# Altium PCB NBP16 Xilinx Spartan-II PQ208 Rev1.01.PcbDoc (part 1 of 2)
Units mm, origin at the board's own origin, x right, y up, seen from the top; angles counter-clockwise.
Board outline 69 x 80.99 mm, 2 copper layers (Top Layer, Bottom Layer); 48 components, 186 nets, 518 pads, 188 vias.
Unrouted connection lines stored in the file: 1.
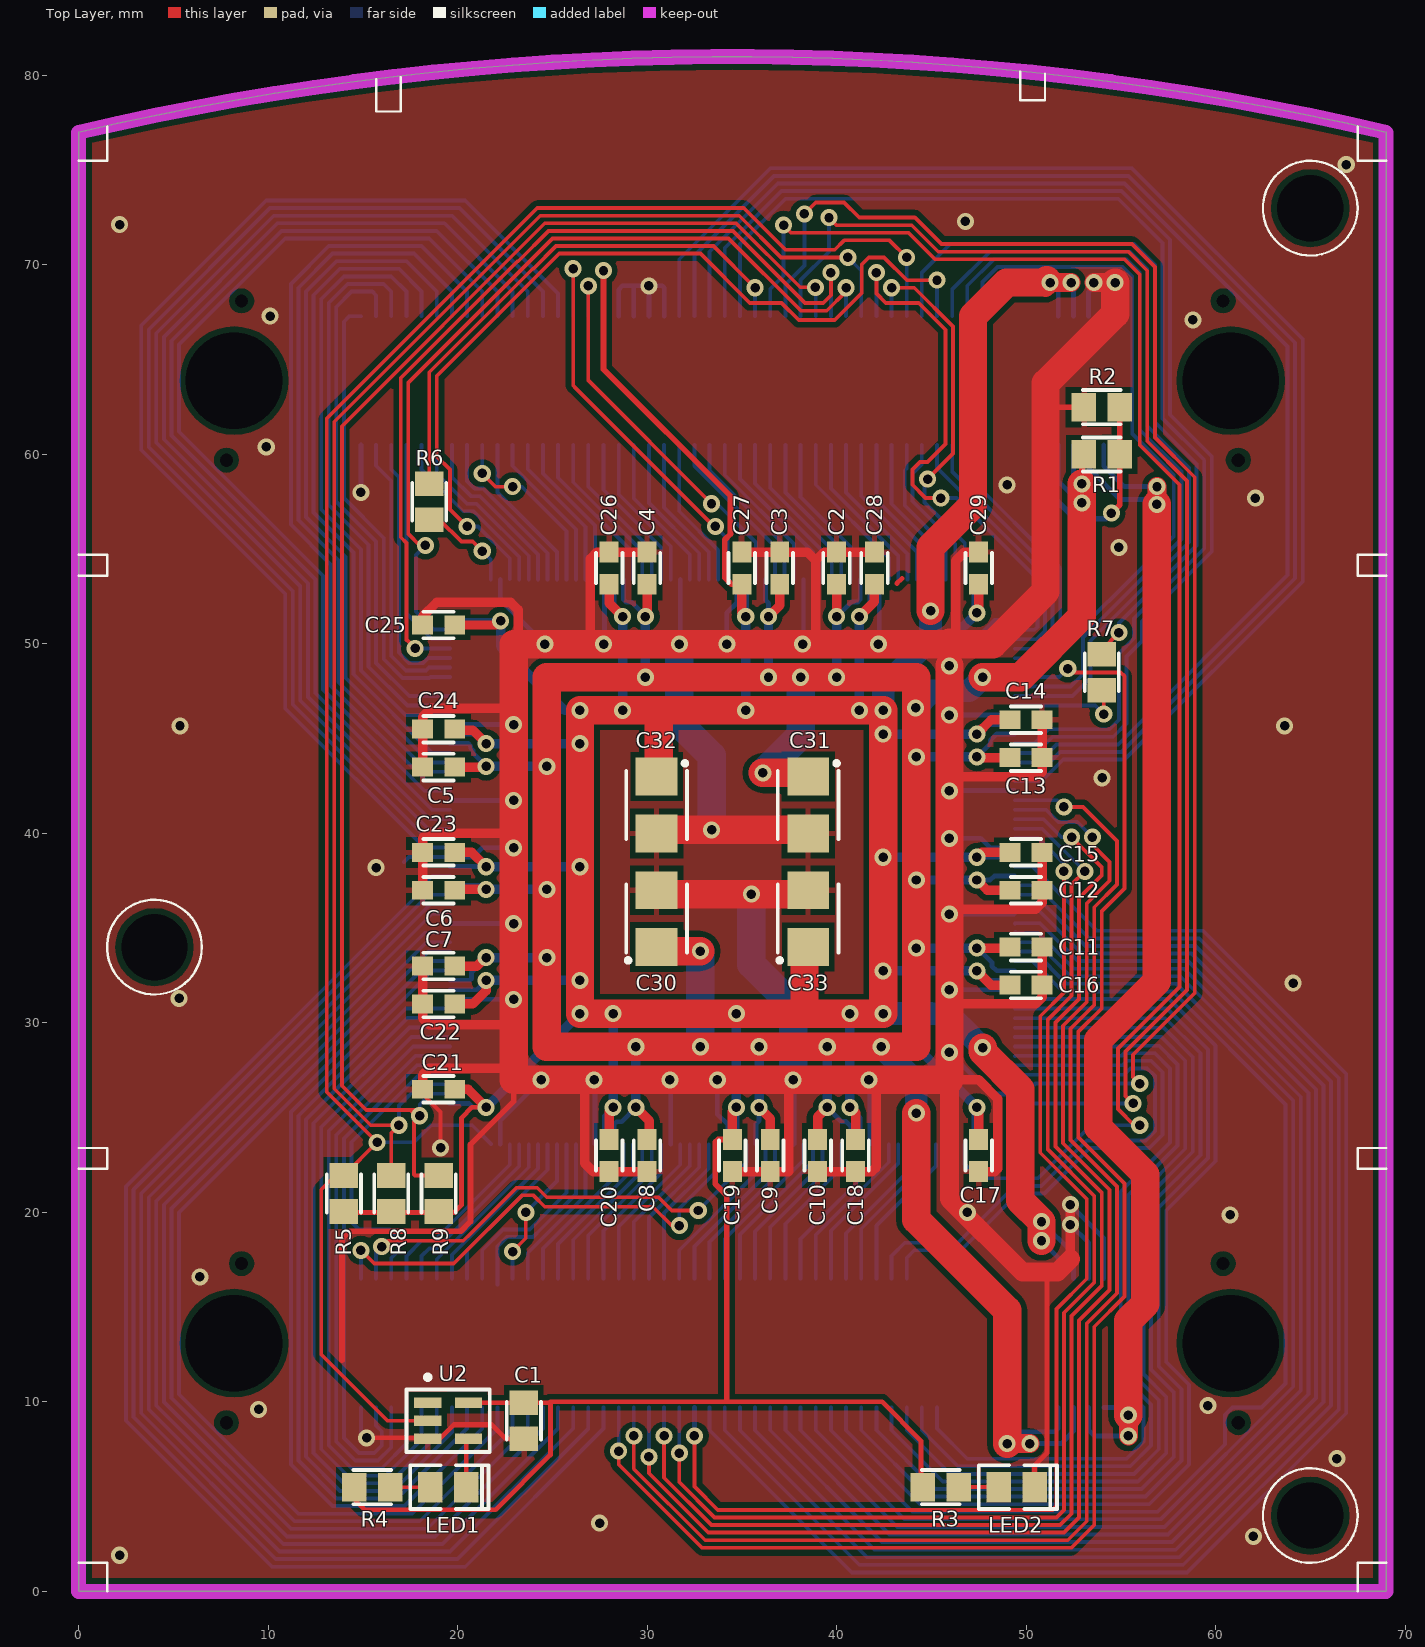
[diagram p0: Top Layer view]
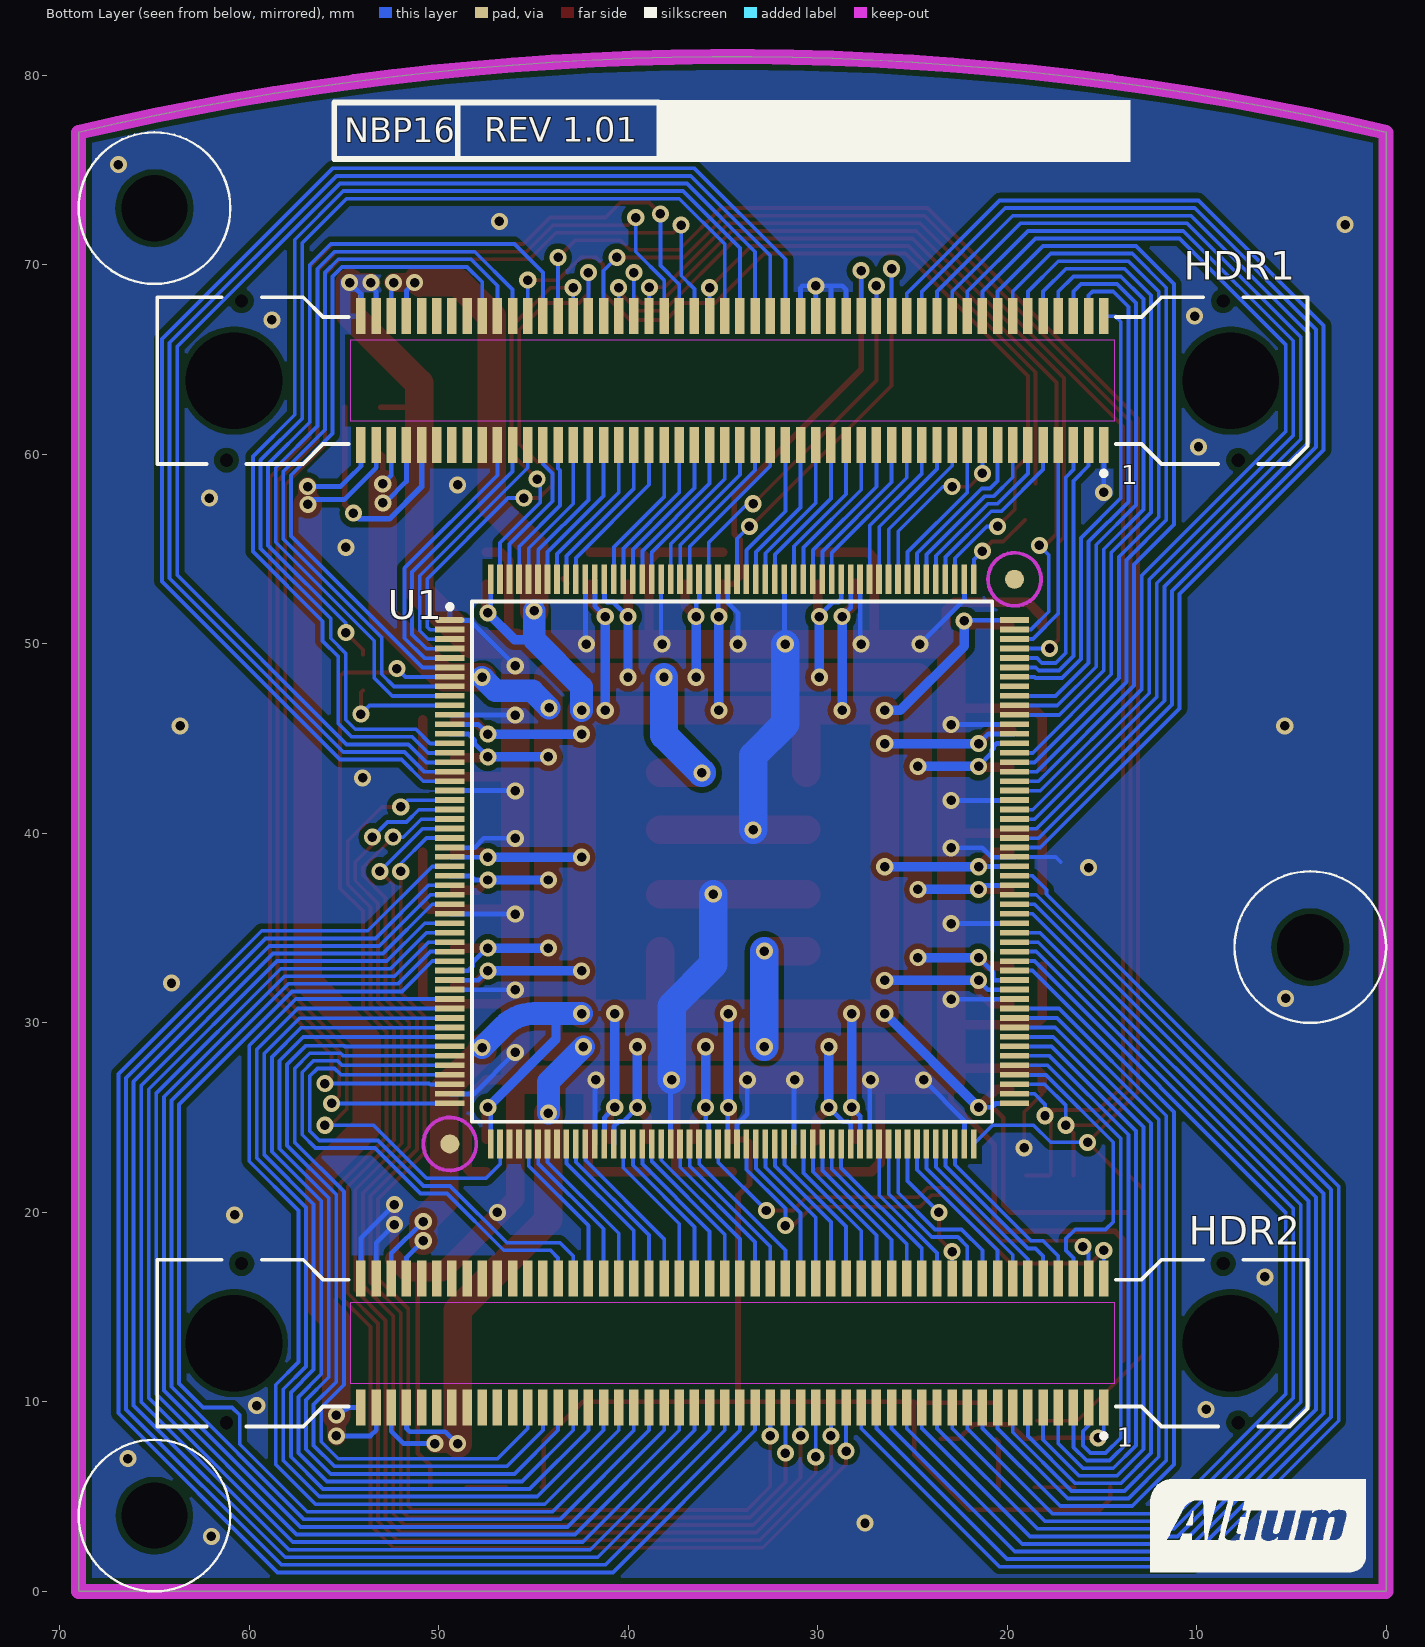
[diagram p1: Bottom Layer view, seen from below]

## Layer stack, top to bottom
Top Layer: signal copper 0.0356
Dielectric: core 0.32, FR-4, Dk 4.8
Bottom Layer: signal copper 0.0356

## Board outline
0,0 0.001,77 cw(c34.5,-69.801) 69,77 69,0

## Design rules (kind name [scope] priority, off if disabled: settings)
Clearance Clearance_Polygons [InPolygon] p1: gap=0.3
Clearance [All] p2: gap=0.2
ComponentClearance [All] p1: gap=0.2 collisioncheckmode=3 verticalgap=0.254 showdistances=FALSE
FabricationTestPointUsage TestPointUsage [All] p1 off: valid=0 allowmultiple=FALSE
FabricationTestpoint Testpoint [All] p1 off: side=3 testpointundercomponent=TRUE minsize=1.016 maxsize=2.54 preferedsize=1.524 minholesize=0 maxholesize=1.016 preferedholesize=0.813 testpointgrid=0.025 allowsidetop=TRUE allowsidebottom=TRUE usegrid=TRUE gridtolerance=0
HoleSize [All] p1: absolutevalues=TRUE maxlimit=5.2 minlimit=0.25 maxpercent=80.000 minpercent=20.000
PlaneClearance [All] p1: clearance=0.5
PlaneConnect PlaneConnect_Vias [IsVia] p1: planeconnectstyle=Direct reliefexpansion=0.508 reliefentries=4 reliefconductorwidth=0.254 reliefairgap=0.254
PlaneConnect [All] p2: planeconnectstyle=Relief reliefexpansion=0.5 reliefentries=4 reliefconductorwidth=0.25 reliefairgap=0.25
PolygonConnect [All] p1: connectstyle=Relief reliefconductorwidth=0.3 reliefentries=4 polygonreliefangle="90 Angle"
RoomDefinition BOCD_SpartanII_PQ208 [InComponentClass('BOCD_SpartanII_PQ208')] p1 off: confinementstyle=ConfineIn formatcopy=TRUE lockcomponents=FALSE outline 3.7,3.8 65.3,3.8 65.3,68.8 3.7,68.8
RoutingVias [All] p1: holewidth=0.5 width=0.9 viastyle="Through Hole" minholewidth=0.3 minwidth=0.6 maxholewidth=0.5 maxwidth=0.9
SMDNeckDown [All] p1: percent=100.000
SilkscreenOverComponentPads [All] p1: minsilkscreentomaskgap=0.254
SolderMaskExpansion SolderMaskExpansion_Vias [IsVia] p1: expansion=-0.2
SolderMaskExpansion [All] p2: expansion=0.1
Width [All] p1: maxlimit=1.5 minlimit=0.2 preferedwidth=0.25
21 further rules are at their usual default settings.

## Components (designator, comment, footprint, x,y, rotation, side; value= is the part's Value field where it differs from the comment)
C1 "0.1uF" CC2012-0805 23.5,9 r90 top
C2 "0.1uF" CC1608-0603 40,54 r90 top
C3 "0.1uF" CC1608-0603 37,54 r90 top
C4 "0.1uF" CC1608-0603 30,54 r90 top
C5 "0.1uF" CC1608-0603 19,43.5 r180 top
C6 "0.1uF" CC1608-0603 19,37 r180 top
C7 "0.1uF" CC1608-0603 19,33 r180 top
C8 "0.1uF" CC1608-0603 30,23 r270 top
C9 "0.1uF" CC1608-0603 36.5,23 r270 top
C10 "0.1uF" CC1608-0603 39,23 r270 top
C11 "0.1uF" CC1608-0603 50,34 r0 top
C12 "0.1uF" CC1608-0603 50,37 r0 top
C13 "0.1uF" CC1608-0603 50,44 r0 top
C14 "0.1uF" CC1608-0603 50,46 r0 top
C15 "0.1uF" CC1608-0603 50,39 r0 top
C16 "0.1uF" CC1608-0603 50,32 r0 top
C17 "0.1uF" CC1608-0603 47.5,23 r90 top
C18 "0.1uF" CC1608-0603 41,23 r90 top
C19 "0.1uF" CC1608-0603 34.5,23 r90 top
C20 "0.1uF" CC1608-0603 28,23 r90 top
C21 "0.1uF" CC1608-0603 19,26.5 r0 top
C22 "0.1uF" CC1608-0603 19,31 r180 top
C23 "0.1uF" CC1608-0603 19,39 r180 top
C24 "0.1uF" CC1608-0603 19,45.5 r180 top
C25 "0.1uF" CC1608-0603 19,51 r0 top
C26 "0.1uF" CC1608-0603 28,54 r270 top
C27 "0.1uF" CC1608-0603 35,54 r270 top
C28 "0.1uF" CC1608-0603 42,54 r270 top
C29 "0.1uF" CC1608-0603 47.5,54 r270 top
C30 "10uF TANT" MCCT-B 30.5,35.5 r90 top
C31 "10uF TANT" MCCT-B 38.5,41.5 r270 top
C32 "10uF TANT" MCCT-B 30.5,41.5 r270 top
C33 "10uF TANT" MCCT-B 38.5,35.5 r90 top
HDR1 "54075-1009" 54075 34.5,63.9 r0 bottom locked
HDR2 "54075-1009" 54075 34.5,13.1 r0 bottom locked
LED1 "HSMG-C170" "SMD _LED" 19.5,5.5 r180 top locked
LED2 "HSMH-C170" "SMD _LED" 49.5,5.5 r180 top locked
R1 "82R 1%" CC2012-0805 54,60 r0 top
R2 "680R 1%" CC2012-0805 54,62.5 r180 top
R3 "270R" CC2012-0805 45.5,5.5 r0 top
R4 "270R" CC2012-0805 15.5,5.5 r180 top
R5 "4K7" CC2012-0805 14,21 r90 top
R6 "100R" CC2012-0805 18.5,57.5 r270 top
R7 "100R" CC2012-0805 54,48.5 r90 top
R8 "4K7" CC2012-0805 16.5,21 r90 top
R9 "4K7" CC2012-0805 19,21 r90 top
U1 "XC2S200-6PQ208C" F-QFP28X28-G208/P.5N 34.5,38.5 r180 bottom locked
U2 "SN74LVC1G04DBV" SO-G5/P.95 19.5,9 r270 top

## Footprints (in the part's own frame and the unit in brackets; to place one, negate y for a bottom-side part, rotate by r counter-clockwise, add the part's x,y. Pads: shape width x height; smd on the part's side, far side on the other; paste and mask are expansions set on the pad)
54075 [mm] "Connector; Docking Station, Receptacle; 100 Position; Vertical"
  rect 0.5x1.9 smd: 1(-19.6,3.4) 2(-19.6,-3.4) 3(-18.8,3.4) 4(-18.8,-3.4) 5(-18,3.4) 6(-18,-3.4) 7(-17.2,3.4) 8(-17.2,-3.4) 9(-16.4,3.4) 10(-16.4,-3.4) 11(-15.6,3.4) 12(-15.6,-3.4) 13(-14.8,3.4) 14(-14.8,-3.4) 15(-14,3.4) 16(-14,-3.4) 17(-13.2,3.4) 18(-13.2,-3.4) 19(-12.4,3.4) 20(-12.4,-3.4) 21(-11.6,3.4) 22(-11.6,-3.4) 23(-10.8,3.4) 24(-10.8,-3.4) 25(-10,3.4) 26(-10,-3.4) 27(-9.2,3.4) 28(-9.2,-3.4) 29(-8.4,3.4) 30(-8.4,-3.4) 31(-7.6,3.4) 32(-7.6,-3.4) 33(-6.8,3.4) 34(-6.8,-3.4) 35(-6,3.4) 36(-6,-3.4) 37(-5.2,3.4) 38(-5.2,-3.4) 39(-4.4,3.4) 40(-4.4,-3.4) 41(-3.6,3.4) 42(-3.6,-3.4) 43(-2.8,3.4) 44(-2.8,-3.4) 45(-2,3.4) 46(-2,-3.4) 47(-1.2,3.4) 48(-1.2,-3.4) 49(-0.4,3.4) 50(-0.4,-3.4) 51(0.4,3.4) 52(0.4,-3.4) 53(1.2,3.4) 54(1.2,-3.4) 55(2,3.4) 56(2,-3.4) 57(2.8,3.4) 58(2.8,-3.4) 59(3.6,3.4) 60(3.6,-3.4) 61(4.4,3.4) 62(4.4,-3.4) 63(5.2,3.4) 64(5.2,-3.4) 65(6,3.4) 66(6,-3.4) 67(6.8,3.4) 68(6.8,-3.4) 69(7.6,3.4) 70(7.6,-3.4) 71(8.4,3.4) 72(8.4,-3.4) 73(9.2,3.4) 74(9.2,-3.4) 75(10,3.4) 76(10,-3.4) 77(10.8,3.4) 78(10.8,-3.4) 79(11.6,3.4) 80(11.6,-3.4) 81(12.4,3.4) 82(12.4,-3.4) 83(13.2,3.4) 84(13.2,-3.4) 85(14,3.4) 86(14,-3.4) 87(14.8,3.4) 88(14.8,-3.4) 89(15.6,3.4) 90(15.6,-3.4) 91(16.4,3.4) 92(16.4,-3.4) 93(17.2,3.4) 94(17.2,-3.4) 95(18,3.4) 96(18,-3.4) 97(18.8,3.4) 98(18.8,-3.4) 99(19.6,3.4) 100(19.6,-3.4)
  round 0.5 hole 0.7 unplated: MH1(-26.7,4.2) MH2(-25.9,-4.2) MH3(26.7,4.2) MH4(25.9,-4.2)
  round 4.8 hole 5.1 unplated: MH5(-26.3,0) MH6(26.3,0)
  Top Layer keep-out region: -20.15,2.15 20.15,2.15 20.15,-2.15 -20.15,-2.15
  silkscreen extent -30.35,-4.4 30.35,5.02
CC1608-0603 [mm]
  rect 1.1x1 smd: 1(-0.85,0) 2(0.85,0)
  silkscreen extent -0.8,-0.7 0.8,0.7
CC2012-0805 [mm]
  rect 1.3x1.5 smd: 1(-0.95,0.003) 2(0.95,0.003)
  silkscreen extent -1,-0.9 1,0.9
F-QFP28X28-G208/P.5N [mm]
  oval 1.55x0.3 smd: 1(-14.91,12.761)
  rect 1.55x0.3 smd: 2(-14.91,12.261) 3(-14.91,11.761) 4(-14.91,11.261) 5(-14.91,10.761) 6(-14.91,10.261) 7(-14.91,9.761) 8(-14.91,9.261) 9(-14.91,8.761) 10(-14.91,8.261) 11(-14.91,7.761) 12(-14.91,7.261) 13(-14.91,6.761) 14(-14.91,6.261) 15(-14.91,5.761) 16(-14.91,5.261) 17(-14.91,4.761) 18(-14.91,4.261) 19(-14.91,3.761) 20(-14.91,3.261) 21(-14.91,2.761) 22(-14.91,2.261) 23(-14.91,1.761) 24(-14.91,1.261) 25(-14.91,0.761) 26(-14.91,0.261) 27(-14.91,-0.239) 28(-14.91,-0.739) 29(-14.91,-1.239) 30(-14.91,-1.739) 31(-14.91,-2.239) 32(-14.91,-2.739) 33(-14.91,-3.239) 34(-14.91,-3.739) 35(-14.91,-4.239) 36(-14.91,-4.739) 37(-14.91,-5.239) 38(-14.91,-5.739) 39(-14.91,-6.239) 40(-14.91,-6.739) 41(-14.91,-7.239) 42(-14.91,-7.739) 43(-14.91,-8.239) 44(-14.91,-8.739) 45(-14.91,-9.239) 46(-14.91,-9.739) 47(-14.91,-10.239) 48(-14.91,-10.739) 49(-14.91,-11.239) 50(-14.91,-11.739) 51(-14.91,-12.239) 52(-14.91,-12.739) 105(14.89,-12.739) 106(14.89,-12.239) 107(14.89,-11.739) 108(14.89,-11.239) 109(14.89,-10.739) 110(14.89,-10.239) 111(14.89,-9.739) 112(14.89,-9.239) 113(14.89,-8.739) 114(14.89,-8.239) 115(14.89,-7.739) 116(14.89,-7.239) 117(14.89,-6.739) 118(14.89,-6.239) 119(14.89,-5.739) 120(14.89,-5.239) 121(14.89,-4.739) 122(14.89,-4.239) 123(14.89,-3.739) 124(14.89,-3.239) 125(14.89,-2.739) 126(14.89,-2.239) 127(14.89,-1.739) 128(14.89,-1.239) 129(14.89,-0.739) 130(14.89,-0.239) 131(14.89,0.261) 132(14.89,0.761) 133(14.89,1.261) 134(14.89,1.761) 135(14.89,2.261) 136(14.89,2.761) 137(14.89,3.261) 138(14.89,3.761) 139(14.89,4.261) 140(14.89,4.761) 141(14.89,5.261) 142(14.89,5.761) 143(14.89,6.261) 144(14.89,6.761) 145(14.89,7.261) 146(14.89,7.761) 147(14.89,8.261) 148(14.89,8.761) 149(14.89,9.261) 150(14.89,9.761) 151(14.89,10.261) 152(14.89,10.761) 153(14.89,11.261) 154(14.89,11.761) 155(14.89,12.261) 156(14.89,12.761)
  rect 0.3x1.55 smd: 53(-12.76,-14.889) 54(-12.26,-14.889) 55(-11.76,-14.889) 56(-11.26,-14.889) 57(-10.76,-14.889) 58(-10.26,-14.889) 59(-9.76,-14.889) 60(-9.26,-14.889) 61(-8.76,-14.889) 62(-8.26,-14.889) 63(-7.76,-14.889) 64(-7.26,-14.889) 65(-6.76,-14.889) 66(-6.26,-14.889) 67(-5.76,-14.889) 68(-5.26,-14.889) 69(-4.76,-14.889) 70(-4.26,-14.889) 71(-3.76,-14.889) 72(-3.26,-14.889) 73(-2.76,-14.889) 74(-2.26,-14.889) 75(-1.76,-14.889) 76(-1.26,-14.889) 77(-0.76,-14.889) 78(-0.26,-14.889) 79(0.24,-14.889) 80(0.74,-14.889) 81(1.24,-14.889) 82(1.74,-14.889) 83(2.24,-14.889) 84(2.74,-14.889) 85(3.24,-14.889) 86(3.74,-14.889) 87(4.24,-14.889) 88(4.74,-14.889) 89(5.24,-14.889) 90(5.74,-14.889) 91(6.24,-14.889) 92(6.74,-14.889) 93(7.24,-14.889) 94(7.74,-14.889) 95(8.24,-14.889) 96(8.74,-14.889) 97(9.24,-14.889) 98(9.74,-14.889) 99(10.24,-14.889) 100(10.74,-14.889) 101(11.24,-14.889) 102(11.74,-14.889) 103(12.24,-14.889) 104(12.74,-14.889) 157(12.74,14.911) 158(12.24,14.911) 159(11.74,14.911) 160(11.24,14.911) 161(10.74,14.911) 162(10.24,14.911) 163(9.74,14.911) 164(9.24,14.911) 165(8.74,14.911) 166(8.24,14.911) 167(7.74,14.911) 168(7.24,14.911) 169(6.74,14.911) 170(6.24,14.911) 171(5.74,14.911) 172(5.24,14.911) 173(4.74,14.911) 174(4.24,14.911) 175(3.74,14.911) 176(3.24,14.911) 177(2.74,14.911) 178(2.24,14.911) 179(1.74,14.911) 180(1.24,14.911) 181(0.74,14.911) 182(0.24,14.911) 183(-0.26,14.911) 184(-0.76,14.911) 185(-1.26,14.911) 186(-1.76,14.911) 187(-2.26,14.911) 188(-2.76,14.911) 189(-3.26,14.911) 190(-3.76,14.911) 191(-4.26,14.911) 192(-4.76,14.911) 193(-5.26,14.911) 194(-5.76,14.911) 195(-6.26,14.911) 196(-6.76,14.911) 197(-7.26,14.911) 198(-7.76,14.911) 199(-8.26,14.911) 200(-8.76,14.911) 201(-9.26,14.911) 202(-9.76,14.911) 203(-10.26,14.911) 204(-10.76,14.911) 205(-11.26,14.911) 206(-11.76,14.911) 207(-12.26,14.911) 208(-12.76,14.911)
  round 1 smd mask+1: FID1(-14.91,-14.889) FID2(14.89,14.911)
  Top Layer keep-out circle w0.2: c14.89,14.911 r1.4
  Top Layer keep-out circle w0.2: c-14.91,-14.889 r1.4
  silkscreen extent -15.03,-13.71 13.72,13.74
MCCT-B [mm]
  rect 2x2.2 smd: 1(-1.5,0) 2(1.5,0)
  silkscreen extent -2.3,-1.6 1.8,1.6
"SMD _LED" [mm]
  rect 1.3x1.6 smd: 1(0.95,0) 2(-0.95,0)
  silkscreen extent -2.13,-1.15 2,1.15
SO-G5/P.95 [mm]
  rect 0.55x1.45 smd: 1(-0.95,-1.075) 2(0,-1.075) 3(0.95,-1.075) 4(0.95,1.075) 5(-0.95,1.075)
  silkscreen extent -2.42,-2.2 1.65,2.2

## Part data
C1 C2 C3 C4 C5 C6 C7 C8 C9 C10 C11 C12 C13 C14 C15 C16 C17 C18 C19 C20 C21 C22 C23 C24 C25 C26 C27 C28 C29: library part CAP, "Capacitor"
C30 C31 C32 C33: library part CAP_POLAR, "Polar Capacitor"
HDR1 HDR2: "Board-to-Board, Docking Station, 0.80mm (.031\") Pitch, Shielded Receptacle, Vertical, Ultra Low Profile, SMT"
LED1 LED2: library part HSMX-C670, "Typical RED GaAs SMD LED Agilent make"
R1 R2 R3 R4 R5 R6 R7 R8 R9: library part RES, "Resistor"
U1: "Spartan-II 2.5V FPGA, 208-Pin PQFP, Higher Performance, Commercial Grade"
U2: library part SN74AHC1G04DBVR

## Free pads (board coordinates)
  round 3.2 hole 3.5 unplated: LP(4,34) LP(65,4) LP(65,73)

## Via types
v1: diameter 0.9, hole 0.5, Top Layer to Bottom Layer, tented both sides, 188 vias

## Nets (pads, with @x,y where several pads share a name; then routed paths per layer and width w, separated by ;. In a path a pad name is that pad's centre, name@x,y a point inside that pad or via, vN(x,y) a via of type N, cw(c..) or ccw(c..) an arc to the next point about the centre after c; other vN are vias at no path point)
5V: HDR1.97 HDR1.99 HDR2.97 HDR2.99 | length 67.6
  Top Layer w1: v1(55.4,8.2) v1(55.4,9.3) ; v1(56.9,57.364) v1(56.911,58.304)
  Top Layer w1.5: v1(55.4,9.3) 55.4,13.538 55.4,14.284 56.3,15.184 56.3,22 53.8,24.5 53.8,29.087 55.05,30.337 56.9,32.187 v1(56.9,57.364)
  Bottom Layer w0.25: HDR2.97@53.3,9.7 53.3,8.5 53.6,8.2 v1(55.4,8.2) ; HDR1.97@53.3,60.5 53.3,59.3 54.982,57.618 56.646,57.618 v1(56.9,57.364) ; HDR2.99@54.1,9.7 54.7,9.7 v1(55.4,9.3) ; HDR1.99@54.1,60.5 54.1,59.375 54.77,58.718 55.184,58.304 v1(56.911,58.304)
AUDIO_SPI_CSN: HDR1.11 U1.161 | length 9.4
  Bottom Layer w0.2: HDR1.11@18.9,60.5 18.9,59 20.5,57.4 21.003,57.4 23.75,54.653 U1.161@23.75,53.4
BLUE0: HDR1.14 U1.140 | length 40.5
  Bottom Layer w0.2: U1.140@19.6,43.25 18.45,43.25 13.7,48 13.7,54.434 11.6,56.534 11.6,68.8 13.4,70.6 17.7,70.6 19.7,68.6 HDR1.14@19.7,67.3
BLUE1: HDR1.16 U1.139 | length 42.9
  Bottom Layer w0.2: U1.139@19.6,42.75 18.35,42.75 13.3,47.8 13.3,54.2 11.2,56.3 11.2,69 13.2,71 18.1,71 20.5,68.6 HDR1.16@20.5,67.3
BOC_CTS: HDR1.13 U1.162 | length 9.3
  Bottom Layer w0.2: HDR1.13@19.7,60.5 19.7,58.8 20.7,57.8 21.169,57.8 24.25,54.719 U1.162@24.25,53.4
BOC_RTS: HDR1.17 U1.165 | length 9.8
  Top Layer w0.2: v1(21.3,59) 22,58.3 v1(22.9,58.3)
  Bottom Layer w0.2: v1(21.3,59) HDR1.17@21.3,60.5 ; v1(22.9,58.3) 23.4,58.3 25.75,55.95 U1.165@25.75,53.4
BOC_RX: HDR1.19 U1.164 | length 8.4
  Bottom Layer w0.2: HDR1.19@22.1,60.5 22.1,58 25.25,54.85 U1.164@25.25,53.4
BOC_TX: HDR1.15 U1.163 | length 9.1
  Bottom Layer w0.2: HDR1.15@20.5,60.5 20.5,58.6 20.9,58.2 21.334,58.2 24.75,54.784 U1.163@24.75,53.4
BUZZER: HDR2.24 U1.94 | length 8.4
  Bottom Layer w0.2: HDR2.24@23.7,16.5 23.7,17.857 26.75,20.907 U1.94@26.75,23.6
CAN_RXD: HDR1.4 U1.148 | length 27.9
  Bottom Layer w0.2: HDR1.4@15.7,67.3 15.7,68.4 15.5,68.6 14.4,68.6 13.6,67.8 13.6,57.5 15.7,55.4 15.7,49 17.45,47.25 U1.148@19.6,47.25
CAN_TXD: HDR1.2 U1.150 | length 23.6
  Bottom Layer w0.2: HDR1.2@14.9,67.3 14.3,67.3 14,67 14,57.7 16.1,55.6 16.1,49.2 17.1,48.2 18.5,48.2 18.561,48.261 U1.150@19.61,48.261
FPGA_AUX0: HDR1.86
FPGA_AUX1: HDR1.88
FPGA_AUX2: HDR1.90
FPGA_AUX3: HDR1.92
FPGA_CCLK: HDR1.66 U1.155 | length 45
  Top Layer w0.2: v1(18.3,55.2) 18,55.2 17.4,55.8 17.4,63.8 25,71.4 34.3,71.4 38.119,67.581 39.481,67.581 40.5,68.6 v1(40.5,68.8)
  Bottom Layer w0.2: v1(18.3,55.2) 17.8,54.7 17.8,51.7 18.739,50.761 U1.155@19.61,50.761 ; HDR1.66@40.5,67.3 v1(40.5,68.8)
FPGA_CLK: HDR2.2 U1.80 | length 25.9
  Top Layer w0.2: v1(14.9,18) 15.6,17.3 19.8,17.3 23.4,20.9 24,20.9 24.6,20.3 30.3,20.3 31.3,19.3 v1(31.7,19.3)
  Bottom Layer w0.2: HDR2.2@14.9,16.5 v1(14.9,18) ; v1(31.7,19.3) 31.7,20.2 33.75,22.25 U1.80@33.75,23.6
FPGA_CLK_1: HDR1.30 U1.182 | length 21.9
  Top Layer w0.2: v1@26.1,69.6 26.1,63.634 26.22,63.514 33.534,56.2 v1(33.6,56.2)
  Bottom Layer w0.2: HDR1.30@26.1,67.3 v1@26.1,69.6 ; v1(33.6,56.2) 34.25,55.55 U1.182@34.25,53.4
  other v1: 26.1,69.8
FPGA_CLK_2: HDR1.32 U1.185 | length 20.5
  Top Layer w0.2: v1@26.9,68.7 26.9,63.9 v1(33.4,57.4)
  Bottom Layer w0.2: HDR1.32@26.9,67.3 v1@26.9,68.7 ; v1(33.4,57.4) 33.7,57.4 35.75,55.35 U1.185@35.75,53.4
  other v1: 26.9,68.9
FPGA_DIN: HDR1.64 U1.153 | length 47.6
  Top Layer w0.2: v1(17.761,49.761) 17.323,50.2 17.3,50.2 17.3,55.334 17,55.634 17,64.034 23.166,70.2 23.2,70.2 24.8,71.8 34.534,71.8 38.334,68 39.3,68 39.7,68.4 v1(39.7,69.6)
  Bottom Layer w0.2: v1(17.761,49.761) U1.153@19.61,49.761 ; HDR1.64@39.7,67.3 v1(39.7,69.6)
FPGA_DONE: HDR1.74 R5.2 U1.104 U2.2 | length 105.2
  Top Layer w0.2: R5.2@13.55,21.95 12.8,21.2 12.8,12.5 16.3,9 U2.2@18.425,9 ; R5.2@13.997,21.95 v1(15.748,23.7) 13.092,26.356 13.092,61.892 24.2,73 35.1,73 37.3,70.8 39.9,70.8 40.4,71.3 42.8,71.3 v1(43.7,70.4)
  Bottom Layer w0.2: v1(15.748,23.7) 17.7,23.7 18.6,24.6 20.771,24.6 U1.104@21.76,23.611 ; HDR1.74@43.7,67.3 v1(43.7,70.4)
FPGA_INIT: HDR1.68 R8.2 U1.107 | length 82.4
  Top Layer w0.2: R8.2@16.497,21.95 16.497,24.197 v1(16.9,24.6) 15.413,24.6 13.492,26.522 13.492,61.726 24.366,72.6 34.866,72.6 37.066,70.4 v1(40.6,70.4)
  Bottom Layer w0.2: v1(16.9,24.6) 16.9,25.634 18.027,26.761 U1.107@19.61,26.761 ; v1(40.6,70.4) 41.3,69.7 HDR1.68@41.3,67.3
FPGA_M0: HDR1.60 U1.52 | length 76.4
  Top Layer w0.2: v1(39.6,72.5) 40,72.1 43.966,72.1 45.366,70.7 55.4,70.7 56.4,69.7 56.4,60.7 58.5,58.6 58.5,31.736 55.25,28.486 55.25,26.15 v1(55.65,25.75)
  Bottom Layer w0.2: HDR1.60@38.1,67.3 38.1,69.2 39.6,70.7 v1(39.6,72.5) ; U1.52@49.4,25.75 v1(55.65,25.75)
FPGA_M1: HDR1.58 U1.50 | length 78.1
  Top Layer w0.2: v1(38.3,72.7) 38.9,73.3 40.4,73.3 41.2,72.5 44.131,72.5 45.531,71.1 55.6,71.1 56.8,69.9 56.8,60.9 58.9,58.8 58.9,31.57 55.65,28.32 55.65,27.15 v1(56,26.8)
  Bottom Layer w0.2: HDR1.58@37.3,67.3 37.3,68.966 38.3,69.966 v1(38.3,72.7) ; U1.50@49.4,26.75 50.45,26.75 50.5,26.8 v1(56,26.8)
FPGA_M2: HDR1.56 U1.54 | length 84.5
  Top Layer w0.2: v1(37.2,72.1) 37.6,71.7 43.8,71.7 45.2,70.3 55.2,70.3 56,69.5 56,60.5 58.1,58.4 58.1,31.902 54.85,28.652 54.85,25.45 55.7,24.6 v1(56,24.6)
  Bottom Layer w0.2: HDR1.56@36.5,67.3 36.5,68.731 37.2,69.431 v1(37.2,72.1) ; U1.54@46.75,23.6 46.75,22.55 47.5,21.8 50.634,21.8 53.434,24.6 v1(56,24.6)
FPGA_PROGRAM: HDR1.62 R9.2 U1.106 | length 79.3
  Top Layer w0.2: 17.5,25.4 17.9,25 17.7,24.8 17.7,22 17.75,21.95 R9.2@18.997,21.95 ; v1(18,25.1) 17.7,25.4 15.179,25.4 13.892,26.687 13.892,61.492 24.6,72.2 34.7,72.2 38.079,68.821 v1(38.879,68.821)
  Bottom Layer w0.2: v1(18,25.1) 18,25.7 18.561,26.261 U1.106@19.61,26.261 ; HDR1.62@38.9,67.3 v1@38.9,68.8
FPGA_TCK: HDR1.72 U1.207 | length 20.5
  Top Layer w0.2: v1(42.9,68.8) 44.1,68.8 46.15,66.75 46.15,60.05 v1(44.8,58.7)
  Bottom Layer w0.2: HDR1.72@42.9,67.3 v1(42.9,68.8) ; v1(44.8,58.7) 44.636,58.536 44.636,57.464 46.76,55.34 U1.207@46.76,53.411 ; U1.207@46.75,53.4 U1.207@46.75,53.411
FPGA_TDI: HDR1.78 U1.159 | length 47.8
  Top Layer w0.2: v1(20.5,56.2) 19.6,57.1 19.6,59.2 18.903,59.897 18.903,64.137 25.366,70.6 32.818,70.6 35.418,68 37.1,68 38,67.1 39.9,67.1 41.328,68.528 41.328,70.028 41.7,70.4 42.5,70.4 43.7,69.2 v1(45.3,69.2)
  Bottom Layer w0.2: v1(20.5,56.2) 21.072,56.2 22.75,54.522 U1.159@22.75,53.411 ; HDR1.78@45.3,67.3 v1(45.3,69.2)
FPGA_TDO: HDR1.54 R6.1 | length 28.3
  Top Layer w0.2: R6.1@18.503,58.45 18.503,64.337 23.966,69.8 24,69.8 25.2,71 33.5,71 v1(35.7,68.8)
  Bottom Layer w0.2: HDR1.54@35.7,67.3 v1(35.7,68.8)
FPGA_TDO#: R6.2 U1.157 | length 4.6
  Top Layer w0.2: R6.2@19.05,56.55 20.2,55.4 20.8,55.4 v1(21.3,54.9)
  Bottom Layer w0.2: v1(21.3,54.9) 21.75,54.45 U1.157@21.75,53.4
FPGA_TMS: HDR1.70 U1.2 | length 29.4
  Top Layer w0.2: v1(42.1,69.6) 42.1,68.5 42.6,68 44.334,68 45.75,66.584 45.75,60.55 44.8,59.6 44.4,59.6 44,59.2 44,58.4 44.7,57.7 v1(45.5,57.7)
  Bottom Layer w0.2: HDR1.70@42.1,67.3 v1(42.1,69.6) ; v1(45.5,57.7) 46.334,57.7 50.6,53.434 50.6,50.9 50.45,50.75 U1.2@49.4,50.75
GND: C1.1 C2.2 C3.2 C4.2 C5.2 C6.2 C7.2 C8.2 C9.2 C10.2 C11.2 C12.2 C13.2 C14.2 C15.2 C16.2 C17.1 C18.1 C19.1 C20.1 C21.1 C22.2 C23.2 C24.2 C25.1 C26.1 C27.1 C28.1 C29.1 C30.2 C31.2 C32.2 C33.2 HDR1.1 HDR1.36 HDR1.38 HDR1.40 HDR1.42 HDR1.98 HDR1.100 HDR2.1 HDR2.98 HDR2.100 LED2.2 R2.2 U1.1 U1.11 U1.19 U1.25 U1.32 U1.40 U1.51 U1.64 U1.72 U1.79 U1.85 U1.93 U1.103 U1.116 U1.124 U1.131 U1.137 U1.145 U1.158 U1.169 U1.177 U1.183 U1.190 U1.198 U2.3 | length 448.2
  Top Layer w0.2: C21.1@18.15,26.5 18.15,26.25 19.1,25.3 v1(19.1,23.4)
  Top Layer w0.25: v1(15.2,8.1) U2.3@18.375,8.1 ; U2.3@18.425,8.05 19.05,8.05 19.8,8.8 21.8,8.8 22.55,8.05 C1.1@23.497,8.05 ; LED2.2@50.45,5.5 50.45,6.65 51.1,7.3 51.1,16.85
  Top Layer w0.3: 13.9,12.2 13.9,18.6 14.3,19 20.164,19 20.683,19.519 20.683,23.583 22.958,25.858 22.958,26.992 ; 51.028,62.497 R2.2@53.05,62.497
  Top Layer w0.5: C21.1@18.15,26.5 18.15,27.25 18.5,27.6 22.958,27.6 ; C7.2@18.15,33 C22.2@18.15,31 18.15,30.25 18.5,29.9 22.858,29.9 22.958,30 ; C6.2@18.15,37 C23.2@18.15,39 18.15,39.75 18.4,40 22.7,40 ; C5.2@18.15,43.5 C24.2@18.15,45.5 18.15,46.15 18.6,46.6 22.858,46.6 ; C25.1@18.2,50.95 C25.1@18.15,51 18.15,51.45 18.9,52.2 22.8,52.2 23.2,51.8 23.2,49.992 ; 26.7,26.992 26.7,22.6 27.15,22.15 C20.1@28,22.15 C8.2@30,22.15 ; 27,49.992 27,54.5 27.35,54.85 C26.1@28,54.85 C4.2@30,54.85 ; C19.1@34.5,22.15 C9.2@36.5,22.15 37.45,22.15 37.48,22.18 v1@37.48,26.912 ; C27.1@35,54.85 38.45,54.85 38.9,54.4 ; v1@37.48,26.764 v1(37.708,26.992) ; 38.9,50.092 38.9,54.4 ; C10.2@39,22.15 C18.1@41,22.15 41.85,22.15 42.1,22.4 v1@42.1,26.992 ; C28.1@42,54.85 C2.2@40,54.85 39.35,54.85 38.9,54.4 ; 45.958,26.992 47.508,26.992 48.5,26 48.5,22.3 48.35,22.15 C17.1@47.5,22.15 ; 45.958,31 50.5,31 50.85,31.35 C16.2@50.85,32 C11.2@50.85,34 ; 45.958,43.1 46.058,43 50.6,43 50.85,43.25 C13.2@50.85,44 C14.2@50.85,46 ; v1@46.2,36.1 46.3,36 50.5,36 50.85,36.35 C12.2@50.85,37 C15.2@50.85,39 ; 46.3,50.2 46.3,54.4 46.75,54.85 C29.1@47.5,54.85 ; 52.339,17.537 v1(52.339,20.407) ; v1@54.01,42.942 v1(54.015,42.937)
  Top Layer w1: 45.958,26.992 45.958,20.707 49.815,16.85 51.652,16.85 52.339,17.537 ; v1(53.575,69.075) v1(54.7,69.075)
  Top Layer w1.5: C30.2@30.608,36.792 C33.2@38.308,36.792 ; C32.2@30.608,40.192 C31.2@38.308,40.192 ; 45.892,49.992 v1(42.208,49.992) v1(24.602,49.992) 22.958,49.992 22.958,26.992 45.958,26.992 v1(45.958,48.842) ; 45.958,50.058 45.958,49.992 48.25,49.992 51.025,52.767 51.025,63.75 54.701,67.418 v1(54.7,69.075)
  Bottom Layer w0.2: HDR2.1@14.9,9.7 14.9,8.4 v1(15.2,8.1) ; 17.172,38.497 17.437,38.761 U1.131@19.61,38.761 ; v1(38.208,49.992) 38.26,50.044 U1.190@38.26,53.411
  Bottom Layer w0.25: v1(14.9,58) HDR1.1@14.9,60.5 ; U1.124@19.558,35.242 v1(22.958,35.242) ; U1.131@19.558,38.742 20.808,38.742 21.308,39.242 v1(22.958,39.242) ; U1.137@19.558,41.742 v1(22.958,41.742) ; U1.145@19.6,45.75 v1@22.95,45.75 ; U1.116@19.608,31.242 19.6,31.25 22.95,31.25 v1(22.958,31.242) ; U1.103@22.25,23.6 22.25,24.834 v1(24.408,26.992) ; U1.158@22.25,53.4 22.25,52.345 v1(24.602,49.992) ; v1(27.208,26.992) 27.25,26.95 U1.93@27.25,23.6 ; v1(27.708,49.992) 27.75,50.034 U1.169@27.75,53.4 ; HDR1.36@28.5,67.3 28.5,68.7 28.7,68.9 v1(30.1,68.9) ; HDR1.38@29.3,67.3 29.3,68.9 ; HDR1.40@30.1,67.3 v1(30.1,68.9) ; HDR1.42@30.9,67.3 30.9,68.8 30.8,68.9 v1(30.1,68.9) ; v1(31.208,26.992) 31.25,26.95 U1.85@31.25,23.6 ; v1(31.708,49.992) 31.75,50.034 U1.177@31.75,53.4 ; v1(33.708,26.992) 33.708,25.192 34.25,24.65 U1.79@34.25,23.6 ; v1(34.208,49.992) 34.208,51.642 ; 34.708,52.142 34.208,51.642 ; U1.183@34.75,53.4 34.75,52.184 34.208,51.642 ; v1(37.708,26.992) 37.76,26.941 U1.72@37.76,23.611 ; v1(41.708,26.992) 41.75,26.95 U1.64@41.75,23.6 ; v1(42.208,49.992) 42.25,50.034 U1.198@42.25,53.4 ; v1(45.958,28.442) 48.158,26.242 U1.51@49.358,26.242 ; v1(45.958,35.742) U1.32@49.358,35.742 ; v1(45.958,39.742) 47.608,39.742 48.1,39.25 U1.25@49.4,39.25 ; v1(45.958,42.242) 45.977,42.261 U1.19@49.41,42.261 ; v1(45.958,46.242) 45.966,46.25 U1.11@49.4,46.25 ; v1(45.958,48.842) 48.278,51.163 48.358,51.242 U1.1@49.358,51.242 ; v1@45.966,31.75 U1.40@49.4,31.75 ; v1(52.339,19.357) 53.3,18.396 HDR2.98@53.3,16.5 ; v1(52.339,20.407) 54.1,18.646 HDR2.100@54.1,16.5 ; HDR1.98@53.3,67.3 53.3,68.575 53.687,68.962 53.75,69.025 v1(53.575,69.075) ; HDR1.100@54.1,67.3 54.1,68.475 v1(54.7,69.075)
  Bottom Layer w1.5: v1(31.708,49.992) 31.708,45.792 33.408,44.092 v1(33.408,40.192) ; v1(35.508,36.792) 35.508,33.092 37.708,30.892 v1(37.708,26.992)
  other v1: 2.159,1.905 62,2.9 27.5,3.6 66.4,7 9.5,9.6 59.6,9.8 6.4,16.6 60.774,19.873 46.9,20 5.3,31.3 45.958,31.742 64.1,32.1 15.7,38.2 5.349,45.68 63.642,45.68 22.958,45.742 54.9,55.1 62.1,57.7 49,58.4 9.9,60.4 58.8,67.1 10.1,67.3 2.159,72.136 46.8,72.3 66.9,75.3
GREEN0: HDR1.10 U1.142 | length 35.8
  Bottom Layer w0.2: HDR1.10@18.1,67.3 18.1,68.6 16.9,69.8 13.8,69.8 12.4,68.4 12.4,56.934 14.5,54.834 14.5,48.4 18.65,44.25 U1.142@19.6,44.25
GREEN1: HDR1.12 U1.141 | length 38.1
  Bottom Layer w0.2: HDR1.12@18.9,67.3 18.9,68.6 17.3,70.2 13.6,70.2 12,68.6 12,56.7 14.1,54.6 14.1,48.2 18.55,43.75 U1.141@19.6,43.75
HDRIVE: HDR1.18 U1.138 | length 51
  Bottom Layer w0.2: U1.138@19.6,42.25 18.25,42.25 12.9,47.6 12.9,53.6 5.3,61.2 5.3,65.8 10.9,71.4 18.5,71.4 21.3,68.6 HDR1.18@21.3,67.3
IO0: HDR2.7 U1.111 | length 31.9
  Bottom Layer w0.2: HDR2.7@17.3,9.7 17.3,7.8 16,6.5 14.4,6.5 13.2,7.7 13.2,24.3 17.661,28.761 U1.111@19.61,28.761
IO1: HDR2.9 U1.112 | length 34.1
  Bottom Layer w0.2: HDR2.9@18.1,9.7 18.1,8 16.2,6.1 14.2,6.1 12.8,7.5 12.8,24.5 17.561,29.261 U1.112@19.61,29.261
IO2: HDR2.11 U1.113 | length 36.4
  Bottom Layer w0.2: HDR2.11@18.9,9.7 18.9,8.2 16.4,5.7 14,5.7 12.4,7.3 12.4,24.7 17.461,29.761 U1.113@19.61,29.761
IO3: HDR2.13 U1.114 | length 38.7
  Bottom Layer w0.2: U1.114@19.61,30.261 17.361,30.261 12,24.9 12,7.1 13.8,5.3 16.6,5.3 19.7,8.4 HDR2.13@19.7,9.7
IO4: HDR2.15 U1.115 | length 40.9
  Bottom Layer w0.2: U1.115@19.61,30.761 17.261,30.761 11.6,25.1 11.6,6.9 13.6,4.9 16.8,4.9 20.5,8.6 HDR2.15@20.5,9.7
IO5: HDR2.17 U1.119 | length 43.9
  Bottom Layer w0.2: U1.119@19.61,32.761 18.661,32.761 11.2,25.3 11.2,6.7 13.4,4.5 17.2,4.5 21.3,8.6 HDR2.17@21.3,9.7
IO6: HDR2.19 U1.120 | length 51.8
  Bottom Layer w0.2: U1.120@19.61,33.261 18.561,33.261 5.3,20 5.3,10.4 11.6,4.1 17.6,4.1 22.1,8.6 HDR2.19@22.1,9.7
IO7: HDR2.21 U1.121 | length 54.1
  Bottom Layer w0.2: U1.121@19.61,33.761 18.461,33.761 4.9,20.2 4.9,10.2 11.4,3.7 18,3.7 22.9,8.6 HDR2.21@22.9,9.7
IO8: HDR2.23 U1.122 | length 56.5
  Bottom Layer w0.2: U1.122@19.61,34.261 18.361,34.261 4.5,20.4 4.5,10 11.2,3.3 18.4,3.3 23.7,8.6 HDR2.23@23.7,9.7
IO9: HDR2.25 U1.123 | length 58.9
  Bottom Layer w0.2: U1.123@19.61,34.761 18.261,34.761 4.1,20.6 4.1,9.8 11,2.9 18.8,2.9 24.5,8.6 HDR2.25@24.5,9.7
IO10: HDR2.27 U1.125 | length 61.5
  Bottom Layer w0.2: U1.125@19.61,35.761 18.661,35.761 3.7,20.8 3.7,9.6 10.8,2.5 19.2,2.5 25.3,8.6 HDR2.27@25.3,9.7
IO11: HDR2.29 U1.126 | length 63.8
  Bottom Layer w0.2: U1.126@19.61,36.261 18.561,36.261 3.3,21 3.3,9.4 10.6,2.1 19.6,2.1 26.1,8.6 HDR2.29@26.1,9.7
IO12: HDR2.31 U1.127 | length 66.2
  Bottom Layer w0.2: U1.127@19.61,36.761 18.461,36.761 2.9,21.2 2.9,9.2 10.4,1.7 20,1.7 26.9,8.6 HDR2.31@26.9,9.7
IO13: HDR2.33 U1.129 | length 68.9
  Bottom Layer w0.2: U1.129@19.61,37.761 18.661,37.761 17.923,37.023 17.923,36.789 2.5,21.366 2.5,9 10.2,1.3 20.4,1.3 27.7,8.6 HDR2.33@27.7,9.7
IO14: HDR2.35 U1.7 | length 84.1
  Top Layer w0.2: v1(28.5,7.4) 28.5,6.7 32.9,2.3 52.4,2.3 53.6,3.5 53.6,13.969 55.2,15.569 55.2,21.528 52.75,23.978 52.75,29.522 54,30.772 54,35.9 55.2,37.1 55.2,48.3 55,48.5 52.4,48.5 v1(52.2,48.7)
  Bottom Layer w0.2: v1(28.5,7.4) HDR2.35@28.5,9.7 ; U1.7@49.4,48.25 51.75,48.25 v1(52.2,48.7)
IO15: HDR2.37 U1.20 | length 74
  Top Layer w0.2: v1(29.3,8.2) 29.3,6.466 33.066,2.7 52.2,2.7 53.2,3.7 53.2,14.134 54.8,15.734 54.8,21.363 52.35,23.813 52.35,29.687 53.6,30.937 53.6,36.1 54.8,37.3 54.8,39.6 53,41.4 v1(52,41.4)
  Bottom Layer w0.2: v1(29.3,8.2) HDR2.37@29.3,9.7 ; U1.20@49.4,41.75 51.65,41.75 v1(52,41.4)
IO16: HDR2.39 U1.21 | length 71.5
  Top Layer w0.2: v1(30.1,7.1) 30.1,6.231 33.231,3.1 52,3.1 52.8,3.9 52.8,14.3 54.4,15.9 54.4,21.197 51.95,23.647 51.95,29.853 53.2,31.103 53.2,36.3 54.4,37.5 54.4,38.5 53.5,39.4 v1(53.5,39.8) ; v1@30.2,7.1 v1@30.2,7.3
  Bottom Layer w0.2: HDR2.39@30.1,9.7 30.1,7.4 v1@30.2,7.3 ; U1.21@49.4,41.25 51.05,41.25 51.7,40.6 52.7,40.6 v1(53.5,39.8)
IO17: HDR2.41 U1.22 | length 68.9
  Top Layer w0.2: v1(30.9,8.2) 30.9,5.997 33.397,3.5 51.8,3.5 52.4,4.1 52.4,14.534 54,16.134 54,21.031 51.55,23.481 51.55,30.019 52.8,31.269 52.8,36.6 54,37.8 54,38.2 v1(52.4,39.8)
  Bottom Layer w0.2: v1(30.9,8.2) HDR2.41@30.9,9.7 ; U1.22@49.4,40.75 50.916,40.75 51.866,39.8 v1(52.4,39.8)
IO18: HDR2.43 U1.23 | length 66
  Top Layer w0.2: v1(31.7,7.3) 31.7,5.763 33.563,3.9 51.6,3.9 52,4.3 52,14.7 53.6,16.3 53.6,20.866 51.15,23.316 51.15,30.184 52.4,31.434 52.4,37.3 v1(53.1,38)
  Bottom Layer w0.2: v1(31.7,7.3) HDR2.43@31.7,9.7 ; U1.23@49.4,40.25 50.85,40.25 v1(53.1,38)
IO19: HDR2.45 U1.24 | length 63.1
  Top Layer w0.2: v1(32.5,8.2) 32.5,5.528 33.728,4.3 51.4,4.3 51.6,4.5 51.6,14.9 53.2,16.5 53.2,20.7 50.75,23.15 50.75,30.35 52,31.6 v1(52,38)
  Bottom Layer w0.2: U1.24@49.4,39.75 U1.24@49.41,39.75 ; U1.24@49.41,39.761 50.639,39.761 52,38.4 v1(52,38)
  Bottom Layer w0.25: v1(32.5,8.2) HDR2.45@32.5,9.7
IO20: HDR2.47 U1.27 | length 81.3
  Bottom Layer w0.2: HDR2.47@33.3,9.7 33.3,8.5 40.8,1 58.5,1 66.9,9.4 66.9,27.3 59.339,34.861 53.739,34.861 50.339,38.261 U1.27@49.41,38.261 ; U1.27@49.4,38.25 U1.27@49.41,38.25
IO21: HDR2.49 U1.29 | length 78.7
  Bottom Layer w0.2: HDR2.49@34.1,9.7 34.1,8.5 41.2,1.4 58.3,1.4 66.5,9.6 66.5,27.1 59.139,34.461 53.339,34.461 50.539,37.261 U1.29@49.41,37.261 ; U1.29@49.4,37.25 U1.29@49.41,37.25
IO22: HDR2.51 U1.30 | length 76.4
  Bottom Layer w0.2: HDR2.51@34.9,9.7 34.9,8.5 41.6,1.8 58.1,1.8 66.1,9.8 66.1,26.9 58.939,34.061 53.139,34.061 50.439,36.761 U1.30@49.41,36.761 ; U1.30@49.4,36.75 U1.30@49.41,36.75
IO23: HDR2.53 U1.31 | length 74
  Bottom Layer w0.2: HDR2.53@35.7,9.7 35.7,8.5 42,2.2 57.9,2.2 65.7,10 65.7,26.7 58.739,33.661 52.939,33.661 50.339,36.261 U1.31@49.41,36.261 ; U1.31@49.4,36.25 U1.31@49.41,36.25
IO24: HDR2.55 U1.33 | length 71.4
  Bottom Layer w0.2: HDR2.55@36.5,9.7 36.5,8.5 42.4,2.6 57.7,2.6 65.3,10.2 65.3,26.5 58.539,33.261 52.739,33.261 50.739,35.261 U1.33@49.41,35.261 ; U1.33@49.4,35.25 U1.33@49.41,35.25
IO25: HDR2.57 U1.34 | length 69.1
  Bottom Layer w0.2: HDR2.57@37.3,9.7 37.3,8.5 42.8,3 57.5,3 64.9,10.4 64.9,26.3 58.339,32.861 52.539,32.861 50.639,34.761 U1.34@49.41,34.761 U1.34@49.448,34.8 ; U1.34@49.4,34.75 U1.34@49.41,34.75
IO26: HDR2.59 U1.35 | length 66.7
  Bottom Layer w0.2: HDR2.59@38.1,9.7 38.1,8.5 43.2,3.4 57.3,3.4 64.5,10.6 64.5,26.1 58.139,32.461 52.339,32.461 50.539,34.261 U1.35@49.41,34.261 ; U1.35@49.4,34.25 U1.35@49.41,34.25
IO27: HDR2.61 U1.36 | length 64.3
  Bottom Layer w0.2: HDR2.61@38.9,9.7 38.9,8.5 43.6,3.8 57.1,3.8 64.1,10.8 64.1,25.9 57.939,32.061 52.139,32.061 50.439,33.761 U1.36@49.41,33.761 ; U1.36@49.4,33.75 U1.36@49.41,33.75
IO28: HDR2.63 U1.37 | length 62.8
  Bottom Layer w0.2: HDR2.63@39.7,9.7 39.7,8.5 44,4.2 56.934,4.2 60.5,7.766 60.5,9.3 60.9,9.7 62.434,9.7 63.7,10.966 63.7,25.7 57.739,31.661 51.939,31.661 50.339,33.261 U1.37@49.41,33.261 ; U1.37@49.4,33.25 U1.37@49.41,33.25
IO29: HDR2.65 U1.41 | length 57.1
  Bottom Layer w0.2: HDR2.65@40.5,9.7 40.5,8.5 44.4,4.6 56.5,4.6 58.6,6.7 58.6,10.9 57.4,12.1 57.4,20.1 60,22.7 60,28.8 57.539,31.261 U1.41@49.41,31.261 ; U1.41@49.4,31.25 U1.41@49.41,31.25
IO30: HDR2.67 U1.42 | length 54.7
  Bottom Layer w0.2: HDR2.67@41.3,9.7 41.3,8.5 44.8,5 56.3,5 58.2,6.9 58.2,10.666 57,11.866 57,16.166 57,20.266 59.6,22.866 59.6,28.6 57.439,30.761 U1.42@49.41,30.761 ; U1.42@49.4,30.75 U1.42@49.41,30.75
IO31: HDR2.69 U1.43 | length 52.3
  Bottom Layer w0.2: HDR2.69@42.1,9.7 42.1,8.5 45.2,5.4 56.1,5.4 57.8,7.1 57.8,10.5 56.6,11.7 56.6,20.431 59.2,23.031 59.2,28.4 57.35,30.25 U1.43@49.4,30.25
IO32: HDR2.71 U1.44 | length 50
  Bottom Layer w0.2: HDR2.71@42.9,9.7 42.9,8.5 45.6,5.8 55.9,5.8 57.4,7.3 57.4,10.266 56.2,11.466 56.2,20.597 58.8,23.197 58.8,28.2 57.25,29.75 U1.44@49.4,29.75
IO33: HDR2.73 U1.45 | length 47.6
  Bottom Layer w0.2: HDR2.73@43.7,9.7 43.7,8.5 46,6.2 55.7,6.2 57,7.5 57,10.1 55.8,11.3 55.8,20.763 58.4,23.363 58.4,28 57.15,29.25 U1.45@49.4,29.25
IO34: HDR2.75 U1.46 | length 45.2
  Bottom Layer w0.2: HDR2.75@44.5,9.7 44.5,8.5 46.4,6.6 55.5,6.6 56.6,7.7 56.6,9.866 55.4,11.066 55.4,20.928 58,23.528 58,27.8 57,28.8 55,28.8 54.961,28.761 U1.46@49.41,28.761
IO35: HDR2.77 U1.47 | length 42.9
  Bottom Layer w0.2: HDR2.77@45.3,9.7 45.3,8.6 46.9,7 55.3,7 56.2,7.9 56.2,9.7 55,10.9 55,21.094 57.6,23.694 57.6,27.6 56.8,28.4 55.169,28.4 55.03,28.261 U1.47@49.41,28.261 ; U1.47@49.4,28.25 U1.47@49.41,28.25
JIOA0: HDR1.3 U1.151 | length 14.9
  Bottom Layer w0.2: HDR1.3@15.7,60.5 15.7,59.4 16.5,58.6 16.5,49.366 17.266,48.6 18.334,48.6 18.484,48.75 U1.151@19.6,48.75
JIOA1: HDR1.5 U1.152 | length 14.2
  Bottom Layer w0.2: HDR1.5@16.5,60.5 16.5,59.2 16.9,58.8 16.9,49.531 17.431,49 18.169,49 18.43,49.261 U1.152@19.61,49.261
JIOA2: HDR1.7 U1.154 | length 11.8
  Bottom Layer w0.2: HDR1.7@17.3,60.5 17.3,51.6 18.639,50.261 U1.154@19.61,50.261
JIOA3: HDR1.9 U1.160 | length 9.5
  Bottom Layer w0.2: HDR1.9@18.1,60.5 18.1,59.2 20.3,57 20.837,57 23.25,54.587 U1.160@23.25,53.4
JIOB0: HDR1.83
JIOB1: HDR1.85
JIOB2: HDR1.87
JIOB3: HDR1.89
KBCLOCK: HDR1.22 U1.135 | length 56
  Bottom Layer w0.2: U1.135@19.6,40.75 18.55,40.75 12.1,47.2 12.1,53.2 4.5,60.8 4.5,66.2 10.5,72.2 19.3,72.2 22.9,68.6 HDR1.22@22.9,67.3
KBDATA: HDR1.24 U1.134 | length 58.4
  Bottom Layer w0.2: U1.134@19.6,40.25 18.45,40.25 11.7,47 11.7,53.034 4.1,60.634 4.1,66.4 10.3,72.6 19.7,72.6 23.7,68.6 HDR1.24@23.7,67.3
LCD_BCKL: HDR2.22 U1.97 | length 8.1
  Top Layer w0.2: v1(22.9,17.934) 23.6,18.634 v1(23.6,20)
  Bottom Layer w0.2: HDR2.22@22.9,16.5 v1(22.9,17.934) ; v1(23.6,20) 25.25,21.65 U1.97@25.25,23.6
LCD_E: HDR2.26 U1.90 | length 8.9
  Bottom Layer w0.2: HDR2.26@24.5,16.5 24.5,18.091 28.76,22.351 U1.90@28.76,23.611
LED0: HDR2.60 U1.63 | length 8.8
  Bottom Layer w0.2: HDR2.60@38.1,16.5 38.1,18.6 42.25,22.75 U1.63@42.25,23.6
LED1: HDR2.62 U1.62 | length 8.7
  Bottom Layer w0.2: HDR2.62@38.9,16.5 38.9,18.8 42.75,22.65 U1.62@42.75,23.6
LED2: HDR2.64 U1.61 | length 8.6
  Bottom Layer w0.2: HDR2.64@39.7,16.5 39.7,19.034 43.25,22.584 U1.61@43.25,23.6
LED3: HDR2.66 U1.59 | length 8.7
  Bottom Layer w0.2: HDR2.66@40.5,16.5 40.5,18.9 44.25,22.65 U1.59@44.25,23.6
LED4: HDR2.68 U1.58 | length 8.5
  Bottom Layer w0.2: HDR2.68@41.3,16.5 41.3,19.134 44.75,22.584 U1.58@44.75,23.6
LED5: HDR2.70 U1.57 | length 8.4
  Bottom Layer w0.2: HDR2.70@42.1,16.5 42.1,19.3 45.25,22.45 U1.57@45.25,23.6
LED6: HDR2.72 U1.49 | length 28.6
  Bottom Layer w0.2: HDR2.72@42.9,16.5 42.9,17.7 43.6,18.4 46.4,18.4 49.4,21.4 50.8,21.4 53.2,23.8 56.3,23.8 56.8,24.3 56.8,27.2 56.4,27.6 55.5,27.6 55.161,27.261 U1.49@49.41,27.261 ; U1.49@49.2,27.3 U1.49@49.41,27.3
LED7: HDR2.74 U1.48 | length 28.7
  Bottom Layer w0.2: HDR2.74@43.7,16.5 43.7,17.6 44.1,18 46.566,18 49.566,21 50.966,21 53.366,23.4 56.5,23.4 57.2,24.1 57.2,27.4 56.6,28 55.334,28 55.096,27.761 U1.48@49.41,27.761 ; U1.48@49.4,27.75 U1.48@49.41,27.75
MOUSECLOCK: HDR1.26 U1.133 | length 60.7
  Bottom Layer w0.2: U1.133@19.6,39.75 18.35,39.75 11.3,46.8 11.3,52.8 3.7,60.4 3.7,66.6 10.1,73 20.1,73 24.5,68.6 HDR1.26@24.5,67.3
MOUSEDATA: HDR1.28 U1.132 | length 63.1
  Bottom Layer w0.2: U1.132@19.6,39.25 18.25,39.25 10.9,46.6 10.9,52.634 3.3,60.234 3.3,66.8 9.9,73.4 20.4,73.4 25.3,68.5 HDR1.28@25.3,67.3
NetLED1_1: LED1.1 R4.1 | length 2.1
  Top Layer w0.2: R4.1@16.45,5.497 LED1.1@18.547,5.497
NetLED1_2: LED1.2 U2.4 | length 2.6
  Top Layer w0.2: U2.4@20.45,7.925 U2.4@20.575,8.05
  Top Layer w0.25: LED1.2@20.45,5.5 U2.4@20.45,7.925
NetLED2_1: LED2.1 R3.2 | length 2.1
  Top Layer w0.2: R3.2@46.45,5.503 LED2.1@48.547,5.503
NEXUS_TCK: HDR1.82 U1.8 | length 39.7
  Bottom Layer w0.2: HDR1.82@46.9,67.3 46.9,68.9 48.3,70.3 55.3,70.3 56,69.6 56,61.3 58.2,59.1 58.2,55.534 53,50.334 53,48.4 52.35,47.75 U1.8@49.4,47.75
NEXUS_TDI: HDR1.84 U1.6 | length 36.1
  Bottom Layer w0.2: HDR1.84@47.7,67.3 47.7,69.1 48.5,69.9 55.1,69.9 55.6,69.4 55.6,61.1 57.8,58.9 57.8,55.7 50.85,48.75 U1.6@49.4,48.75
NEXUS_TDO: HDR1.76 R7.2 | length 39.2
  Top Layer w0.2: R7.2@53.997,49.45 53.997,49.697 v1(54.9,50.6)
  Bottom Layer w0.2: HDR1.76@44.5,67.3 44.5,69.6 46,71.1 55.7,71.1 56.8,70 56.8,61.7 59,59.5 59,55.203 54.9,51.103 v1(54.9,50.6)
NEXUS_TDO#: R7.1 U1.10 | length 6.2
  Top Layer w0.2: R7.1@53.997,47.55 54.1,47.447 v1(54.1,46.3)
  Bottom Layer w0.2: U1.10@49.4,46.75 53.65,46.75 v1(54.1,46.3)